# EAGLE board NQSMHS-SMD (EAGLE 6.4)
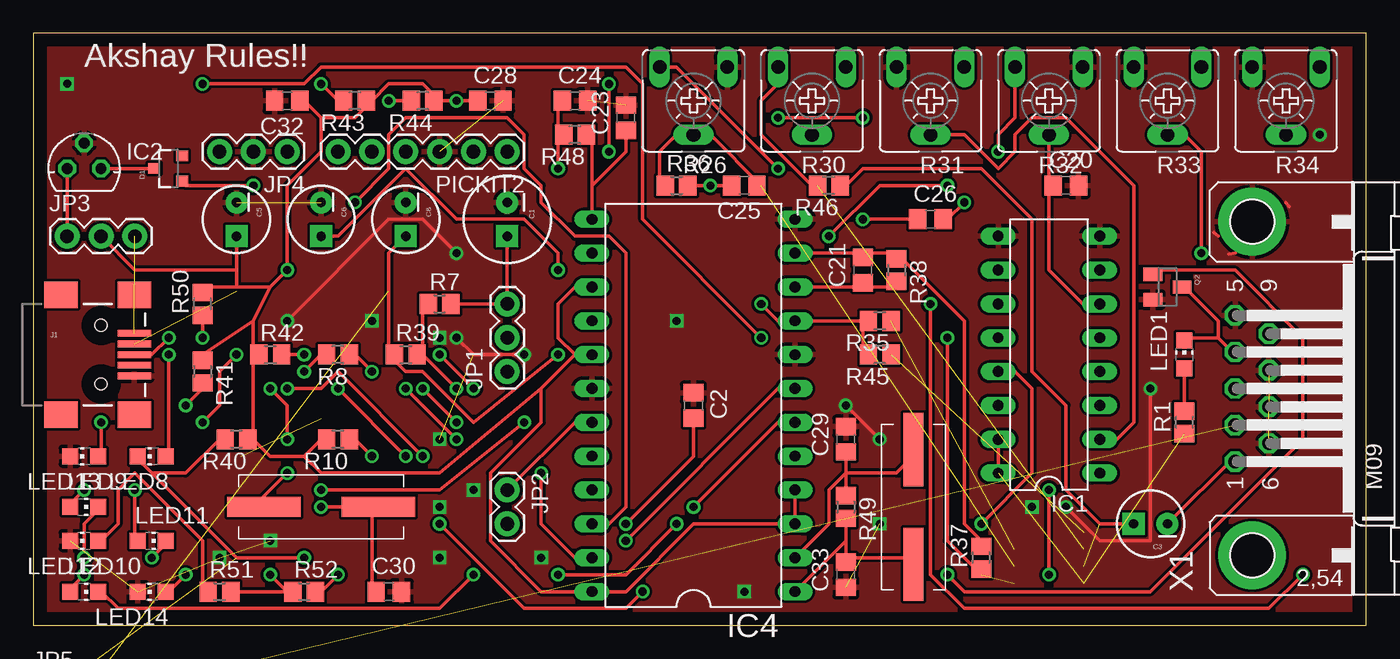
[diagram p0: board, top side]
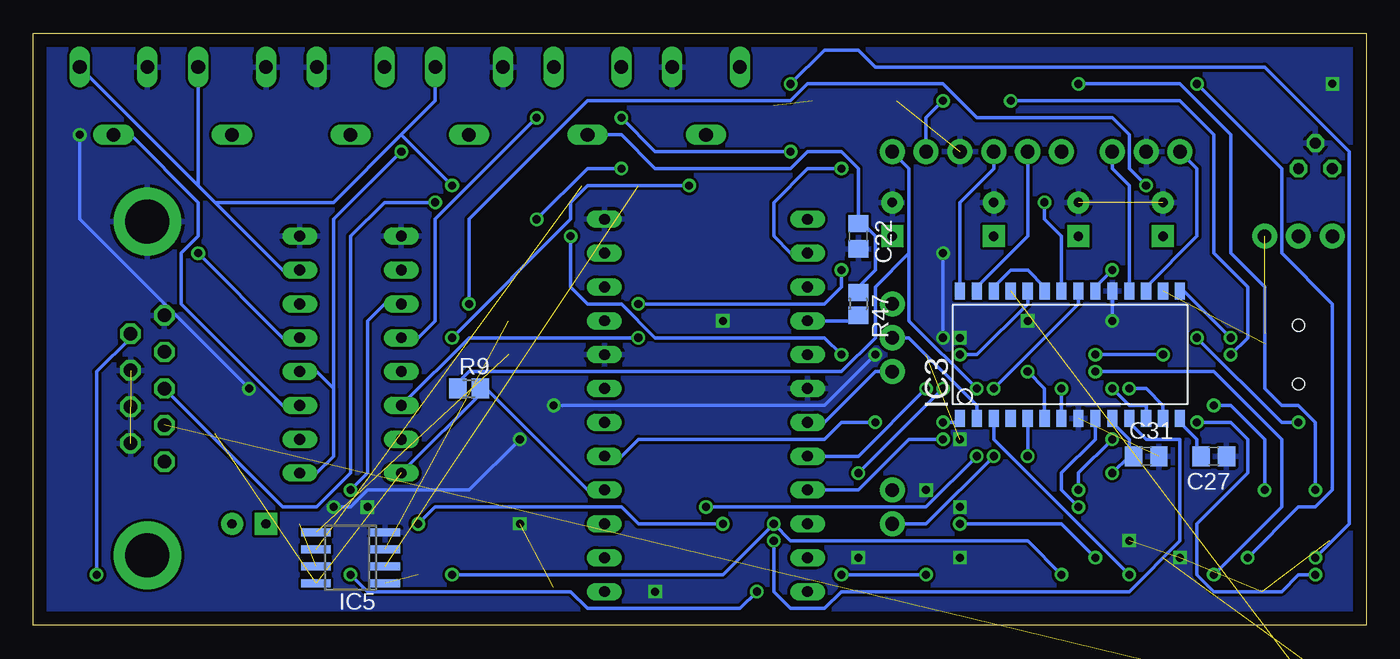
[diagram p1: board, bottom side, seen from below]

Size 100 x 44.44 mm. Coordinates in mm from the lower left corner, seen from the top.
Outline: 0,0 100,0 100,44.44 0,44.44 0,0
Copper layers (1*16): Top 0.035mm / dielectric 1.5mm / Bottom 0.035mm
Design rules "default": minimum track width 10mil, minimum drill 24mil, track to track 8mil, track to pad 8mil, pad to pad 8mil, via to via 8mil, smd to smd 8mil, copper to edge 40mil, drill to drill 8mil, minimum pad ring 10mil, minimum via ring 8mil, stop-mask expansion 4mil, vias tented up to drill 0mil, thermal gap 10mil

## Footprints (pad centres in the part's own frame; a part is rotated, then mirrored left to right if it is on the bottom)
CPOL-RADIAL-100UF-25V = drill 0.7 pad 1.651 square: 1 1.27,0 | drill 0.7 pad 1.651: 2 -1.27,0
C0805 = smd 1.3 x 1.5: 1 -0.95,0; 2 0.95,0
CPOL-RADIAL-10UF-25V = drill 0.7 pad 1.651 square: 1 1.27,0 | drill 0.7 pad 1.651: 2 -1.27,0
SOT23-3 = smd 0.8 x 0.9: 1 -0.95,-1; 2 0.95,-1; 3 0,1.1
DIL16 = drill 0.813 long: 1 -8.89,-3.81; 2 -6.35,-3.81; 3 -3.81,-3.81; 4 -1.27,-3.81; 5 1.27,-3.81; 6 3.81,-3.81; 7 6.35,-3.81; 8 8.89,-3.81; 9 8.89,3.81; 10 6.35,3.81; 11 3.81,3.81; 12 1.27,3.81; 13 -1.27,3.81; 14 -3.81,3.81; 15 -6.35,3.81; 16 -8.89,3.81
78LXX = drill 0.813 octagon: GND 0,1.905; IN 1.27,0; OUT -1.27,0
SO28W = smd 0.762 x 1.27: 1 -7.62,-4.78; 2 -6.35,-4.78; 3 -5.08,-4.78; 4 -3.81,-4.78; 5 -2.54,-4.78; 6 -1.27,-4.78; 7 0,-4.78; 8 1.27,-4.78; 9 2.54,-4.78; 10 3.81,-4.78; 11 5.08,-4.78; 12 6.35,-4.78; 13 7.62,-4.78; 14 8.89,-4.78; 15 8.89,4.78; 16 7.62,4.78; 17 6.35,4.78; 18 5.08,4.78; 19 3.81,4.78; 20 2.54,4.78; 21 1.27,4.78; 22 0,4.78; 23 -1.27,4.78; 24 -2.54,4.78; 25 -3.81,4.78; 26 -5.08,4.78; 27 -6.35,4.78; 28 -7.62,4.78
DIL24-6 = drill 0.813 long: 1 -13.97,-7.62; 2 -11.43,-7.62; 3 -8.89,-7.62; 4 -6.35,-7.62; 5 -3.81,-7.62; 6 -1.27,-7.62; 7 1.27,-7.62; 8 3.81,-7.62; 9 6.35,-7.62; 10 8.89,-7.62; 11 11.43,-7.62; 12 13.97,-7.62; 13 13.97,7.62; 14 11.43,7.62; 15 8.89,7.62; 16 6.35,7.62; 17 3.81,7.62; 18 1.27,7.62; 19 -1.27,7.62; 20 -3.81,7.62; 21 -6.35,7.62; 22 -8.89,7.62; 23 -11.43,7.62; 24 -13.97,7.62
SO08 = smd 0.6 x 2.2: 1 -1.905,-2.6; 2 -0.635,-2.6; 3 0.635,-2.6; 4 1.905,-2.6; 5 1.905,2.6; 6 0.635,2.6; 7 -0.635,2.6; 8 -1.905,2.6
USB-MINIB = smd 2.5 x 0.5: D+ 2.5,0; D- 2.5,0.8; GND 2.5,-1.6; ID 2.5,-0.8; VBUS 2.5,1.6 | smd 2.5 x 2: GND@1 -3,-4.5; GND@2 -3,4.5; GND@3 2.5,4.5; GND@4 2.5,-4.5 | hole 0.9: 0,2.2; 0,-2.2
1X03 = drill 1.016 pad 1.88: 1 0,0; 2 2.54,0; 3 5.08,0
1X02 = drill 1.016 pad 1.88: 1 0,0; 2 2.54,0
CHIP-LED0805 = smd 1.2 x 1.2: A 0,-1.05; C 0,1.05
1X06 = drill 1.016 pad 1.88: 1 0,0; 2 2.54,0; 3 5.08,0; 4 7.62,0; 5 10.16,0; 6 12.7,0
CRYSTAL-SMD-10.5X4.8-2PIN = smd 5.5 x 1.5: P$1 -4.3,0; P$2 4.3,0
SOT23 = smd 1 x 1.4: 1 -0.95,-1.1; 2 0.95,-1.1; 3 0,1.1
R0805 = smd 1.3 x 1.5: 1 -0.85,0; 2 0.85,0
CA6V = drill 1.016 long: A -2.54,-2.54; E 2.54,-2.54; S 0,2.54
M09HP = drill 1.016 octagon: 1 -5.486,1.27; 2 -2.743,1.27; 3 0,1.27; 4 2.743,1.27; 5 5.486,1.27; 6 -4.115,-1.27; 7 -1.372,-1.27; 8 1.372,-1.27; 9 4.115,-1.27 | drill 3.302 pad 5.08: G1 -12.522,0; G2 12.522,0

## Placement (x,y rotation side)
C1  10uF  [CPOL-RADIAL-100UF-25V]  35.56,30.48 270 top
C2  0.1uF  [C0805]  49.53,16.51 270 top
C3  4.7uF  [CPOL-RADIAL-10UF-25V]  83.82,7.62 180 top
C5  47uF  [CPOL-RADIAL-10UF-25V]  15.24,30.48 270 top
C6  1uF  [CPOL-RADIAL-10UF-25V]  21.59,30.48 270 top
C8  10uF  [CPOL-RADIAL-10UF-25V]  27.94,30.48 270 top
C20  0.1uF  [C0805]  77.47,33.02 0 top
C21  22pF  [C0805]  62.23,26.67 90 top
C22  22pF  [C0805]  38.1,29.21 270 bottom
C23  0.1uF  [C0805]  44.45,38.1 90 top
C24  0.1uF  [C0805]  40.64,39.37 0 top
C25  330pF  [C0805]  53.34,33.02 180 top
C26  0.1uF  [C0805]  67.31,30.48 0 top
C27  0.1uF  [C0805]  11.43,12.7 180 bottom
C28  0.1uF  [C0805]  34.29,39.37 0 top
C29  22pF  [C0805]  60.96,13.97 90 top
C30  22pF  [C0805]  26.67,2.54 0 top
C31  22pF  [C0805]  16.51,12.7 0 bottom
C32  0.1uF  [C0805]  19.05,39.37 180 top
C33  22pF  [C0805]  60.96,3.81 90 top
D1  1N4001  [SOT23-3]  10.16,34.29 90 top
IC1  MAX8213  [DIL16]  76.2,20.32 90 top
IC2  78L05  [78LXX]  3.81,34.29 0 top
IC3  PIC18F2550_28W  [SO28W]  22.86,20.32 0 bottom
IC4  CMX589PA4  [DIL24-6]  49.53,16.51 90 top
IC5  LM4558  [SO08]  76.2,5.08 90 bottom
J1  USBSMD  [USB-MINIB]  5.08,20.32 0 top
JP1  SW4  [1X03]  35.56,19.05 90 top
JP2  SW3  [1X02]  35.56,10.16 270 top
JP3  SW1  [1X03]  2.54,29.21 0 top
JP4  SERIAL  [1X03]  19.05,35.56 180 top
JP5  SW4  [1X03]  1.27,-5.08 0 top  (outside the outline)
LED1  PTT  [CHIP-LED0805]  86.36,20.32 0 top
LED8  DCOS  [CHIP-LED0805]  8.89,12.7 90 top
LED9  LOW  [CHIP-LED0805]  3.81,8.89 270 top
LED10  MED  [CHIP-LED0805]  3.81,2.54 270 top
LED11  HIGH  [CHIP-LED0805]  8.89,6.35 270 top
LED12  PTT  [CHIP-LED0805]  3.81,6.35 90 top
LED13  PWR  [CHIP-LED0805]  3.81,12.7 90 top
LED14  COS  [CHIP-LED0805]  8.89,2.54 90 top
PICKIT2  PICKIT2  [1X06]  35.56,35.56 180 top
Q1  24MHz  [CRYSTAL-SMD-10.5X4.8-2PIN]  21.59,8.89 0 top
Q2  2N3904  [SOT23]  85.09,25.4 270 top
Q3  4.9152MHz  [CRYSTAL-SMD-10.5X4.8-2PIN]  66.04,8.89 270 top
R1  1K  [R0805]  86.36,15.24 90 top
R7  27K  [R0805]  30.48,24.13 0 top
R8  47K  [R0805]  22.86,20.32 180 top
R9  10K  [R0805]  67.31,17.78 0 bottom
R10  47K  [R0805]  22.86,13.97 180 top
R26  500K  [CA6V]  49.53,39.37 180 top
R30  500K  [CA6V]  58.42,39.37 180 top
R31  100K  [CA6V]  67.31,39.37 180 top
R32  10K  [CA6V]  76.2,39.37 180 top
R33  100K  [CA6V]  85.09,39.37 180 top
R34  100K  [CA6V]  93.98,39.37 180 top
R35  510K  [R0805]  63.5,22.86 180 top
R36  180K  [R0805]  48.26,33.02 0 top
R37  100K  [R0805]  71.12,5.08 90 top
R38  100K  [R0805]  64.77,26.67 270 top
R39  27K  [R0805]  27.94,20.32 0 top
R40  47K  [R0805]  15.24,13.97 180 top
R41  470R  [R0805]  12.7,19.05 270 top
R42  470R  [R0805]  17.78,20.32 0 top
R43  470R  [R0805]  24.13,39.37 180 top
R44  470R  [R0805]  29.21,39.37 180 top
R45  510K  [R0805]  63.5,20.32 180 top
R46  47K  [R0805]  59.69,33.02 180 top
R47  100K  [R0805]  38.1,24.13 270 bottom
R48  1M  [R0805]  40.64,36.83 180 top
R49  1M  [R0805]  60.96,8.89 270 top
R50  1K  [R0805]  12.7,24.13 90 top
R51  1K  [R0805]  13.97,2.54 0 top
R52  4K7  [R0805]  20.32,2.54 0 top
X1  DB9M  [M09HP]  91.44,17.78 90 top

## Library data of the parts
C1 C3 C5 C6 C8 D1 J1 JP1-JP5 PICKIT2 Q1-Q3 = SparkFun
C2 C20-C33 = rcl
IC1 IC4 = ic-package
IC2 = v-reg
IC3 = microchip
IC5 = linear
LED1 LED8-LED14 = led
R1 R7-R10 R35-R52 = resistor
R26 R30-R34 = pot
X1 = con-subd

## Nets
+5V: J1.VBUS JP3.3
+12V: D1.1 X1.9
COS: IC3.25 JP5.2
COS/COR/SQL: JP5.3 X1.2
DCOS: IC1.11 JP5.1 LED8.C R40.2
GND: C1.2 C2.1 C5.2 C6.2 C8.2 C20.2 C22.2 C23.2 C24.2 C27.1 C28.2 C29.2 C30.2 C31.2 C32.2 C33.1 IC1.8 IC1.9 IC2.GND IC3.8 IC3.19 IC4.8 IC4.12 IC4.18 IC5.4 J1.GND JP4.2 LED12.C LED13.C LED14.C PICKIT2.3 Q2.2 R26.A R31.E R32.A R33.E R34.E X1.5 X1.6 X1.7 X1.8 X1.G2
N$1: LED1.A R1.2
N$2: D1.3 IC2.IN
N$4: IC3.5 R10.1
N$5: IC3.6 R8.1
N$6: LED14.A R8.2
N$7: IC3.7 JP2.2
N$8: C1.1 JP1.3 R7.2
N$9: C30.1 IC3.9 Q1.P$2
N$10: C31.1 IC3.10 Q1.P$1
N$11: C27.2 IC3.14
N$12: IC2.OUT JP3.1
N$13: LED13.A R50.1
N$14: C2.2 Q2.1 R52.2
N$15: C25.2 IC5.1 R36.2 R37.1
N$16: LED12.A R51.1
N$17: IC5.3 R35.1
N$18: C25.1 IC5.2 R26.S R36.1
N$19: IC5.6 R30.E R46.2
N$20: C26.1 R26.E
N$21: C22.1 R30.S R47.1
N$22: C3.1 IC5.7 R46.1
N$23: C8.1 IC1.7 R31.A R33.A R34.A R39.1
N$24: IC5.5 R45.1
N$25: C20.1 IC1.6 R32.S
N$27: IC1.1 IC1.4 R32.E
N$28: IC1.14 LED11.C
N$29: LED11.A R41.2
N$30: IC1.13 LED10.C
N$31: LED10.A R42.2
N$32: IC1.12 LED9.C
N$33: IC1.2 R31.S
N$34: LED8.A R44.2
N$35: LED9.A R43.2
N$36: IC1.5 R33.S
N$38: C33.2 IC4.1 Q3.P$2 R49.2
N$39: IC1.3 R34.S
N$42: C23.1 IC4.13 R48.1
N$43: C24.1 IC4.14 R48.2
N$46: IC3.23 IC3.26
N$53: IC3.17 JP4.3
N$54: IC3.18 JP4.1
N$59: C29.1 IC4.2 Q3.P$1 R49.1
PGC: IC3.27 PICKIT2.5
PGD: IC3.28 PICKIT2.4
PLLACQ: IC3.11 IC4.7
PTT: IC3.3 R51.2 R52.1
RCFB: C21.1 IC4.10 R38.2
RXCLOCK: IC3.21 IC4.21
RXDATA: IC3.24 IC4.20
RXDATA/SPKR: C26.2 X1.3
RXDCACQ: IC3.12 IC4.6
RXHOLD: IC3.13 IC4.5
RXSIGIN: C21.2 IC4.11 R37.2 R38.1
RXSN: IC4.23 R7.1 R39.2
TRXPTT: LED1.C Q2.3 X1.4
TX/SN: IC3.2 JP1.2
TXCLOCK: IC3.22 IC4.22
TXDATA: IC4.19 JP1.1 JP2.1
TXDATA/MIC: C3.2 X1.1
TXOUT: IC4.16 R47.2
USB+: IC3.16 J1.D-
USB-: IC3.15 J1.D+
VBIAS: C6.1 IC4.9 R35.2 R45.2
VCC: C5.1 C28.1 C32.1 IC1.15 IC1.16 IC3.20 IC4.3 IC4.4 IC4.15 IC4.17 IC4.24 IC5.8 JP3.2 PICKIT2.2 R1.1 R9.2 R10.2 R40.1 R41.1 R42.1 R43.1 R44.1 R50.2
VPP: IC3.1 PICKIT2.1 R9.1

## Tracks (layer width: path | path; a pad name or v marks a point on that pad's centre or on a via)
+5V  (1 unrouted)
+12V  (via drill 0.61)
  Top 0.254: v16.51,33.02 11.43,33.02 D1.1 | v67.31,24.13 67.31,3.81 69.85,1.27 92.71,1.27 v95.25,3.81
  Bottom 0.254: v16.51,33.02 17.78,34.29 17.78,36.83 19.05,38.1 29.21,38.1 31.75,40.64 41.91,40.64 43.18,39.37 58.42,39.37 67.31,30.48 v67.31,24.13 | v95.25,3.81 95.25,19.05 92.71,21.59 X1.9
COS  (1 unrouted)
COS/COR/SQL  (1 unrouted)
DCOS  (via drill 0.61)  (1 unrouted)
  Top 0.254: 8.89,11.43 7.62,12.7 LED8.C | 8.89,11.43 11.43,11.43 13.97,13.97 R40.2 | v76.2,3.81 v76.2,10.16 | v45.72,2.54 44.45,1.27 36.83,1.27 v30.48,7.62 | v20.32,5.08 15.24,5.08 8.89,11.43
  Bottom 0.254: IC1.11 73.66,24.13 74.93,22.86 74.93,11.43 v76.2,10.16 | v76.2,3.81 74.93,2.54 59.69,2.54 58.42,1.27 46.99,1.27 v45.72,2.54 | v30.48,7.62 22.86,7.62 v20.32,5.08
GND  (via drill 0.6, 0.61)  (11 unrouted)
  Top 0.254: 90.17,27.94 89.7,27.85 | 88.9,29.21 88.56,29.47 | 93.98,31.75 94.21,31.45 | 91.44,30.48 91.24,30.1 | v83.82,17.78 83.82,6.35 80.01,6.35 v77.47,8.89 | v60.96,16.51 v63.5,13.97 | v36.83,20.32 33.02,20.32 v31.75,21.59 | v31.75,27.94 29.21,30.48 26.67,30.48 v19.05,22.86
  Bottom 0.254: v96.52,36.83 96.52,30.48 v83.82,17.78 | v77.47,8.89 76.2,8.89 74.93,10.16 67.31,10.16 v63.5,13.97 | v60.96,16.51 40.64,16.51 v36.83,20.32 | v31.75,27.94 v31.75,21.59 | v19.05,22.86 IC3.19 19.05,25.4 | IC4.12
  other vias: 2.54,40.64 48.26,22.86 53.34,2.54 74.93,8.89 63.5,7.62 38.1,5.08 33.02,10.16 30.48,13.97 17.78,6.35 30.48,8.89 30.48,5.08 13.97,5.08 25.4,22.86 30.48,21.59
  pour Bottom: 0,0 100.33,0 100.33,44.45 0,44.45
  pour Top: 0,0 100.33,0 100.33,44.45 0,44.45
N$1
  Top 0.254: R1.2 LED1.A
N$2
  Top 0.254: IC2.IN D1.3
N$4  (via drill 0.61)
  Top 0.254: v25.4,12.7 24.13,13.97 R10.1
  Bottom 0.254: v25.4,12.7 IC3.5
N$5  (via drill 0.61)
  Top 0.254: v25.4,19.05 24.13,20.32 R8.1
  Bottom 0.254: v25.4,19.05 24.13,17.78 IC3.6 24.13,15.24
N$6  (via drill 0.61)
  Top 0.254: v11.43,3.81 10.16,2.54 LED14.A | v20.32,19.05 21.59,20.32 R8.2
  Bottom 0.254: v11.43,3.81 6.35,8.89 6.35,13.97 11.43,19.05 v20.32,19.05
N$7  (via drill 0.61)
  Top 0.254: v27.94,12.7 v22.86,17.78
  Bottom 0.254: v22.86,17.78 IC3.7 22.86,15.24 | v27.94,12.7 33.02,7.62 JP2.2
N$8
  Top 0.254: R7.2 JP1.3 C1.1
N$9  (via drill 0.61)
  Top 0.254: 25.4,8.89 v21.59,8.89 | 25.4,8.89 25.4,2.54 C30.1 | 25.4,8.89 Q1.P$2
  Bottom 0.254: IC3.9 20.32,13.97 22.86,11.43 22.86,10.16 v21.59,8.89
N$10  (via drill 0.61)
  Top 0.254: v19.05,11.43 16.51,8.89 Q1.P$1
  Bottom 0.254: 17.78,12.7 17.78,13.97 19.05,15.24 IC3.10 | v19.05,11.43 17.78,12.7 | 17.78,12.7 C31.1
N$11
  Bottom 0.254: IC3.14 13.97,15.24 12.7,13.97 12.7,12.7 C27.2
N$12
  Top 0.254: JP3.1 IC2.OUT
N$13  (via drill 0.61)
  Top 0.254: v5.08,15.24 5.08,12.7 LED13.A | R50.1 v12.7,21.59
  Bottom 0.254: v5.08,15.24 6.35,15.24 v12.7,21.59
N$14  (via drill 0.61)
  Top 0.254: v68.58,3.81 69.85,2.54 83.82,2.54 95.25,13.97 95.25,21.59 90.17,26.67 83.82,26.67 Q2.1 | v22.86,3.81 21.59,2.54 R52.2 | C2.2 49.53,12.7 v44.45,7.62
  Bottom 0.254: v68.58,3.81 48.26,3.81 v44.45,7.62 43.18,6.35 25.4,6.35 v22.86,3.81
N$15  (via drill 0.61)  (1 unrouted)
  Top 0.254: v68.58,21.59 68.58,6.35 71.12,3.81 R37.1 | R36.2 v50.8,33.02 C25.2
  Bottom 0.254: v68.58,21.59 59.69,30.48 59.69,31.75 58.42,33.02 v50.8,33.02
N$16
  Top 0.254: LED12.A 5.08,6.35 6.35,7.62 6.35,10.16 7.62,11.43 12.7,6.35 12.7,2.54 R51.1
N$17  (1 unrouted)
N$18  (1 unrouted)
  Top 0.254: R36.1 46.99,33.02 46.99,35.56 48.26,36.83 R26.S 50.8,36.83 54.61,33.02 C25.1
N$19  (1 unrouted)
  Top 0.254: R30.E 55.88,40.64 54.61,39.37 54.61,36.83 58.42,33.02 R46.2
N$20  (via drill 0.61)
  Top 0.254: v62.23,30.48 C26.1 | v55.88,34.29 48.26,41.91 R26.E
  Bottom 0.254: v62.23,30.48 58.42,34.29 v55.88,34.29
N$21
  Bottom 0.254: 38.1,30.48 36.83,29.21 36.83,26.67 38.1,25.4 R47.1 | R30.S 55.88,36.83 53.34,34.29 43.18,34.29 41.91,35.56 39.37,35.56 38.1,34.29 38.1,30.48 | 38.1,30.48 C22.1
N$22  (1 unrouted)
  Top 0.254: C3.1 80.01,7.62 77.47,10.16 77.47,16.51 74.93,19.05 74.93,30.48 71.12,34.29 62.23,34.29 60.96,33.02 R46.1
N$23  (via drill 0.61)
  Top 0.254: 26.67,20.32 26.67,27.94 C8.1 | 26.67,20.32 27.94,19.05 29.21,19.05 33.02,15.24 v39.37,20.32 | v59.69,29.21 63.5,33.02 v68.58,33.02 | 26.67,20.32 R39.1
  Bottom 0.254: IC1.7 81.28,26.67 86.36,31.75 | 87.63,33.02 86.36,31.75 | R33.A 87.63,33.02 | R31.A 69.85,39.37 72.39,36.83 | 72.39,36.83 77.47,31.75 86.36,31.75 | 87.63,33.02 R34.A | v39.37,20.32 40.64,21.59 53.34,21.59 55.88,24.13 58.42,24.13 59.69,25.4 v59.69,29.21 | 72.39,36.83 v68.58,33.02
N$24  (1 unrouted)
N$25
  Top 0.254: R32.S 76.2,33.02 | IC1.6 78.74,24.13 76.2,26.67 76.2,33.02 | 76.2,33.02 C20.1
N$27  (via drill 0.61)
  Top 0.254: R32.E 73.66,38.1 72.39,36.83 v72.39,35.56
  Bottom 0.254: IC1.1 78.74,11.43 77.47,12.7 77.47,17.78 | 77.47,17.78 78.74,19.05 IC1.4 | v72.39,35.56 77.47,30.48 77.47,17.78
N$28  (via drill 0.61)
  Top 0.254: v8.89,5.08 10.16,6.35 LED11.C | v12.7,40.64 20.32,40.64 21.59,41.91 44.45,41.91 45.72,40.64 45.72,30.48 v54.61,21.59
  Bottom 0.254: v8.89,5.08 5.08,8.89 3.81,8.89 2.54,10.16 2.54,24.13 6.35,27.94 6.35,34.29 v12.7,40.64 | v54.61,21.59 67.31,21.59 IC1.14
N$29  (via drill 0.61)
  Top 0.254: v7.62,10.16 7.62,6.35 LED11.A | v11.43,16.51 12.7,17.78 R41.2
  Bottom 0.254: v7.62,10.16 7.62,13.97 10.16,16.51 v11.43,16.51
N$30  (via drill 0.61)
  Top 0.254: v33.02,3.81 30.48,1.27 6.35,1.27 5.08,2.54 LED10.C | v39.37,3.81 44.45,3.81 v48.26,7.62 | v71.12,7.62 74.93,11.43 74.93,17.78 73.66,19.05 IC1.13
  Bottom 0.254: v39.37,3.81 v33.02,3.81 | v48.26,7.62 54.61,7.62 55.88,8.89 69.85,8.89 v71.12,7.62
N$31  (via drill 0.61)
  Top 0.254: v3.81,3.81 2.54,2.54 LED10.A | v12.7,15.24 13.97,16.51 13.97,19.05 v15.24,20.32 | R42.2 v20.32,20.32
  Bottom 0.254: v3.81,3.81 5.08,3.81 6.35,2.54 11.43,2.54 12.7,3.81 12.7,7.62 8.89,11.43 8.89,13.97 10.16,15.24 v12.7,15.24 | v20.32,20.32 v15.24,20.32
N$32  (via drill 0.61)
  Top 0.254: v3.81,5.08 3.81,7.62 5.08,8.89 LED9.C | v43.18,35.56 v43.18,40.64 | v62.23,38.1 v55.88,38.1
  Bottom 0.254: v3.81,5.08 1.27,7.62 1.27,35.56 7.62,41.91 36.83,41.91 38.1,43.18 40.64,43.18 v43.18,40.64 | v43.18,35.56 53.34,35.56 v55.88,38.1 | v62.23,38.1 69.85,30.48 69.85,22.86 71.12,21.59 IC1.12
N$33
  Top 0.254: IC1.2 81.28,13.97 82.55,15.24 82.55,33.02 77.47,38.1 74.93,38.1 73.66,36.83 73.66,35.56 72.39,34.29 69.85,36.83 R31.S
N$34  (via drill 0.61)
  Top 0.254: v10.16,20.32 10.16,12.7 LED8.A | R44.2 v26.67,39.37
  Bottom 0.254: v10.16,20.32 8.89,21.59 8.89,25.4 11.43,27.94 11.43,36.83 13.97,39.37 v26.67,39.37
N$35  (via drill 0.61)
  Top 0.254: v3.81,10.16 2.54,8.89 LED9.A | v21.59,40.64 22.86,39.37 R43.2
  Bottom 0.254: v3.81,10.16 3.81,15.24 5.08,16.51 6.35,16.51 7.62,17.78 7.62,25.4 10.16,27.94 10.16,36.83 13.97,40.64 v21.59,40.64
N$36  (via drill 0.61)
  Top 0.254: v87.63,27.94 87.63,35.56 86.36,36.83 R33.S
  Bottom 0.254: IC1.5 81.28,21.59 v87.63,27.94
N$38
  Top 0.254: R49.2 60.96,6.35 | 60.96,6.35 60.96,5.08 | 60.96,5.08 66.04,5.08 Q3.P$2 | 60.96,5.08 C33.2 | 60.96,6.35 IC4.1
N$39
  Bottom 0.254: IC1.3 81.28,16.51 88.9,24.13 88.9,27.94 87.63,29.21 87.63,31.75 92.71,36.83 R34.S
N$42
  Top 0.254: IC4.13 41.91,33.02 | 41.91,33.02 41.91,36.83 R48.1 | C23.1 44.45,35.56 41.91,33.02
N$43  (via drill 0.61)
  Top 0.254: 39.37,36.83 39.37,39.37 C24.1 | v39.37,34.29 39.37,36.83 | 39.37,36.83 R48.2
  Bottom 0.254: v39.37,34.29 41.91,34.29 44.45,31.75 44.45,29.21 43.18,27.94 IC4.14
N$46
  Bottom 0.254: IC3.23 24.13,25.4 25.4,26.67 26.67,26.67 27.94,25.4 IC3.26
N$53
  Bottom 0.254: JP4.3 12.7,34.29 12.7,29.21 16.51,25.4 IC3.17
N$54
  Bottom 0.254: IC3.18 17.78,33.02 19.05,34.29 JP4.1
N$59
  Top 0.254: C29.1 60.96,11.43 | 60.96,11.43 R49.1 | 60.96,11.43 64.77,11.43 66.04,12.7 Q3.P$1 | IC4.2 59.69,7.62 59.69,10.16 60.96,11.43
PGC
  Bottom 0.254: PICKIT2.5 25.4,29.21 29.21,25.4 IC3.27
PGD
  Bottom 0.254: IC3.28 30.48,31.75 27.94,34.29 PICKIT2.4
PLLACQ  (via drill 0.61)
  Top 0.254: v44.45,6.35 55.88,17.78 IC4.7
  Bottom 0.254: v44.45,6.35 44.45,2.54 43.18,1.27 40.64,1.27 39.37,2.54 17.78,2.54 13.97,6.35 13.97,13.97 16.51,13.97 17.78,15.24 IC3.11
PTT  (via drill 0.61)
  Top 0.254: 19.05,2.54 v17.78,3.81 | 19.05,2.54 R51.2 | 19.05,2.54 R52.1
  Bottom 0.254: IC3.3 27.94,13.97 v17.78,3.81
RCFB
  Top 0.254: IC4.10 62.23,25.4 | 62.23,25.4 64.77,25.4 R38.2 | 62.23,25.4 C21.1
RXCLOCK  (via drill 0.61)
  Top 0.254: v31.75,13.97 v27.94,17.78
  Bottom 0.254: v27.94,17.78 21.59,24.13 IC3.21 21.59,25.4 | v31.75,13.97 34.29,13.97 38.1,10.16 IC4.21
RXDATA  (via drill 0.61)
  Top 0.254: v33.02,17.78 v30.48,20.32
  Bottom 0.254: v30.48,20.32 29.21,20.32 25.4,24.13 IC3.24 25.4,25.4 | v33.02,17.78 38.1,12.7 IC4.20
RXDATA/SPKR  (via drill 0.61)
  Top 0.254: v69.85,31.75 68.58,30.48 C26.2
  Bottom 0.254: v69.85,31.75 73.66,31.75 76.2,29.21 76.2,11.43 78.74,8.89 81.28,8.89 X1.3
RXDCACQ  (via drill 0.61)
  Top 0.254: v19.05,17.78 21.59,17.78 22.86,19.05 v29.21,12.7 | v49.53,8.89 55.88,15.24 IC4.6
  Bottom 0.254: v19.05,17.78 17.78,16.51 16.51,16.51 IC3.12 16.51,15.24 | v49.53,8.89 33.02,8.89 v29.21,12.7
RXHOLD  (via drill 0.61)
  Top 0.254: v17.78,17.78 19.05,16.51 v19.05,13.97 | v21.59,10.16 30.48,10.16 v36.83,15.24
  Bottom 0.254: v17.78,17.78 16.51,17.78 15.24,16.51 IC3.13 15.24,15.24 | v19.05,13.97 21.59,11.43 v21.59,10.16 | v36.83,15.24 39.37,15.24 40.64,13.97 54.61,13.97 55.88,12.7 IC4.5
RXSIGIN
  Top 0.254: IC4.11 62.23,27.94 | 62.23,27.94 64.77,27.94 | 62.23,27.94 C21.2 | 64.77,27.94 69.85,22.86 69.85,7.62 71.12,6.35 R37.2 | 64.77,27.94 R38.1
RXSN  (via drill 0.61)
  Top 0.254: 29.21,20.32 29.21,24.13 R7.1 | IC4.23 40.64,5.08 38.1,7.62 v38.1,11.43 | 29.21,20.32 v31.75,17.78 | 29.21,20.32 R39.2
  Bottom 0.254: v31.75,17.78 v38.1,11.43
TRXPTT
  Top 0.254: 88.9,21.59 88.9,22.86 86.36,25.4 Q2.3 | 88.9,21.59 90.17,20.32 X1.4 | 88.9,21.59 86.36,21.59 LED1.C
TX/SN
  Bottom 0.254: JP1.2 34.29,21.59 29.21,16.51 IC3.2 29.21,15.24
TXCLOCK  (via drill 0.61)
  Top 0.254: v24.13,31.75 26.67,34.29 26.67,36.83 27.94,38.1 35.56,38.1 36.83,36.83 36.83,34.29 38.1,33.02 38.1,31.75 40.64,29.21 43.18,29.21 44.45,27.94 44.45,8.89 43.18,7.62 IC4.22
  Bottom 0.254: IC3.22 22.86,29.21 24.13,30.48 v24.13,31.75
TXDATA
  Top 0.254: IC4.19 40.64,15.24 JP2.1
  Bottom 0.254: JP1.1 36.83,19.05 40.64,15.24 IC4.19
TXDATA/MIC
  Top 0.254: C3.2 90.17,12.7 X1.1
TXOUT
  Bottom 0.254: IC4.16 38.1,22.86 R47.2
USB+  (1 unrouted)
USB-  (via drill 0.61)
  Top 0.254: v10.16,21.59 8.89,20.32 J1.D+
  Bottom 0.254: v10.16,21.59 13.97,25.4 IC3.15
VBIAS  (via drill 0.61)
  Top 0.254: C6.1 22.86,29.21 27.94,34.29 31.75,30.48 36.83,30.48 39.37,27.94 v39.37,26.67 | v54.61,24.13 55.88,22.86 IC4.9 62.23,22.86 | 62.23,22.86 62.23,20.32 R45.2 | 62.23,22.86 R35.2
  Bottom 0.254: v39.37,26.67 39.37,25.4 40.64,24.13 v54.61,24.13
VCC  (via drill 0.61)  (2 unrouted)
  Top 0.254: IC1.15 IC1.16 | IC4.4 IC4.3 49.53,7.62 44.45,2.54 IC4.24 38.1,2.54 34.29,6.35 34.29,11.43 38.1,15.24 38.1,17.78 | 40.64,20.32 39.37,21.59 39.37,24.13 40.64,25.4 IC4.15 | 16.51,20.32 16.51,13.97 | 20.32,12.7 21.59,13.97 R10.2 | 20.32,12.7 17.78,12.7 16.51,13.97 | 16.51,13.97 R40.1 | 38.1,17.78 30.48,11.43 21.59,11.43 20.32,12.7 | 38.1,17.78 40.64,20.32 | 40.64,20.32 IC4.17 | C28.1 v31.75,39.37 30.48,39.37 | 21.59,38.1 20.32,39.37 C32.1 | 21.59,38.1 24.13,38.1 25.4,39.37 | 30.48,39.37 29.21,40.64 26.67,40.64 25.4,39.37 | 30.48,39.37 R44.1 | 25.4,39.37 R43.1 | 16.51,22.86 12.7,20.32 R41.1 | 16.51,22.86 17.78,25.4 | 17.78,25.4 v19.05,26.67 19.05,33.02 21.59,35.56 21.59,38.1 | 17.78,25.4 15.24,25.4 | 15.24,25.4 12.7,25.4 R50.2 | 15.24,25.4 15.24,26.67 | 15.24,26.67 C5.1 | JP3.2 7.62,26.67 15.24,26.67 | 16.51,22.86 16.51,20.32 | 16.51,20.32 R42.1
  Bottom 0.254: PICKIT2.2 33.02,38.1 v31.75,39.37 | v19.05,26.67 20.32,25.4 IC3.20 | IC1.16 66.04,17.78 | 66.04,17.78 58.42,10.16 IC4.4 | 66.04,17.78 R9.2
VPP  (via drill 0.61)
  Top 0.254: v29.21,17.78 v31.75,15.24
  Bottom 0.254: v31.75,15.24 30.48,15.24 IC3.1 | v29.21,17.78 34.29,22.86 34.29,27.94 | 34.29,27.94 34.29,34.29 PICKIT2.1 | 34.29,27.94 36.83,25.4 36.83,21.59 39.37,19.05 67.31,19.05 68.58,17.78 R9.1

## Text on the board
tNames: Akshay Rules!!